# Altium PCB ADL5536-PCB.PcbDoc
Units mil, origin at the board's own origin, x right, y up, seen from the top; angles counter-clockwise.
Board outline 1503.03 x 1138.03 mil, 2 copper layers (Top Layer, Bottom Layer); 14 components, 6 nets, 63 pads, 87 vias.
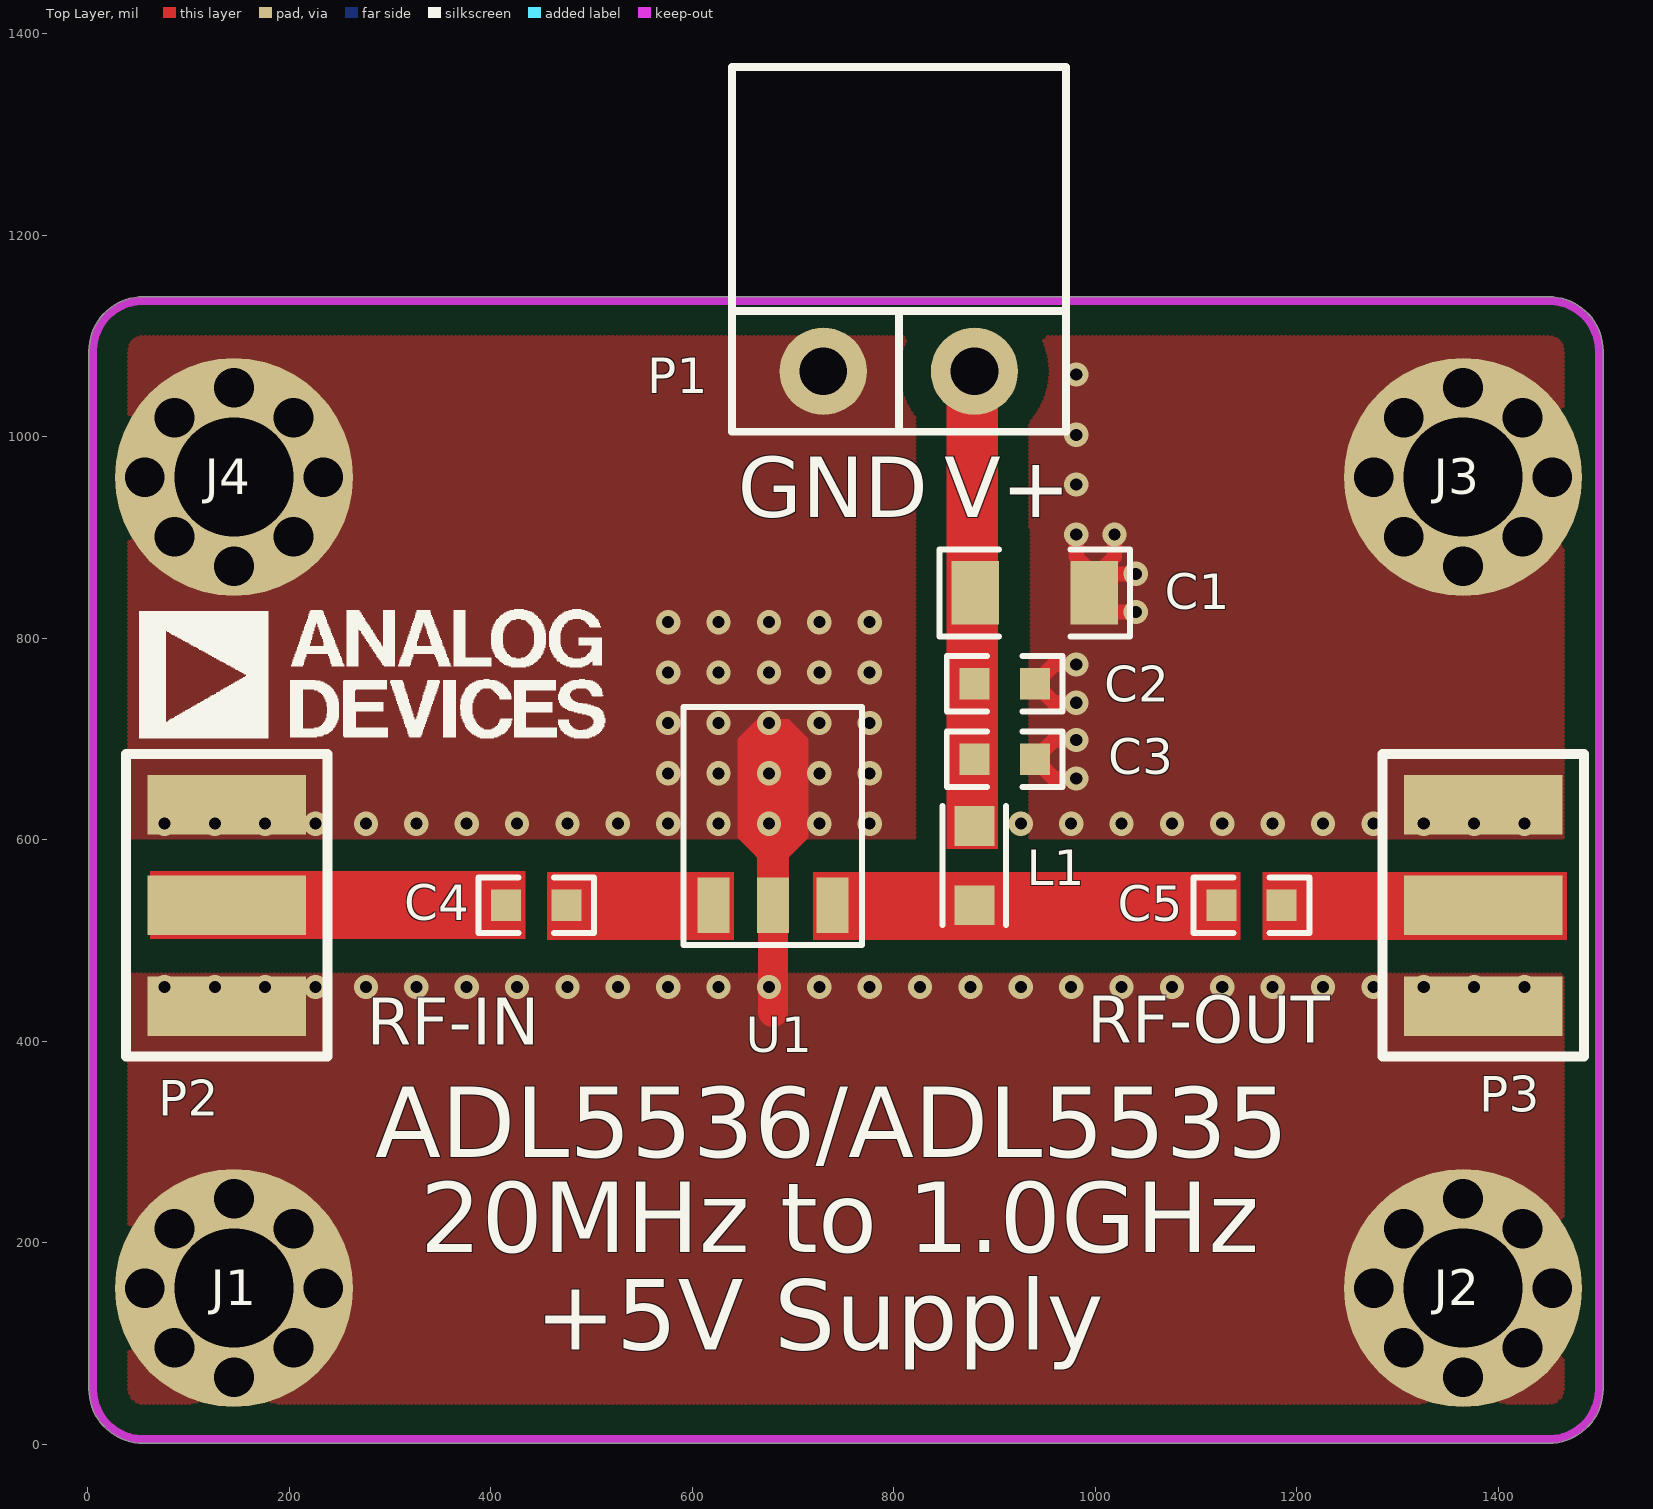
[diagram p0: Top Layer view]
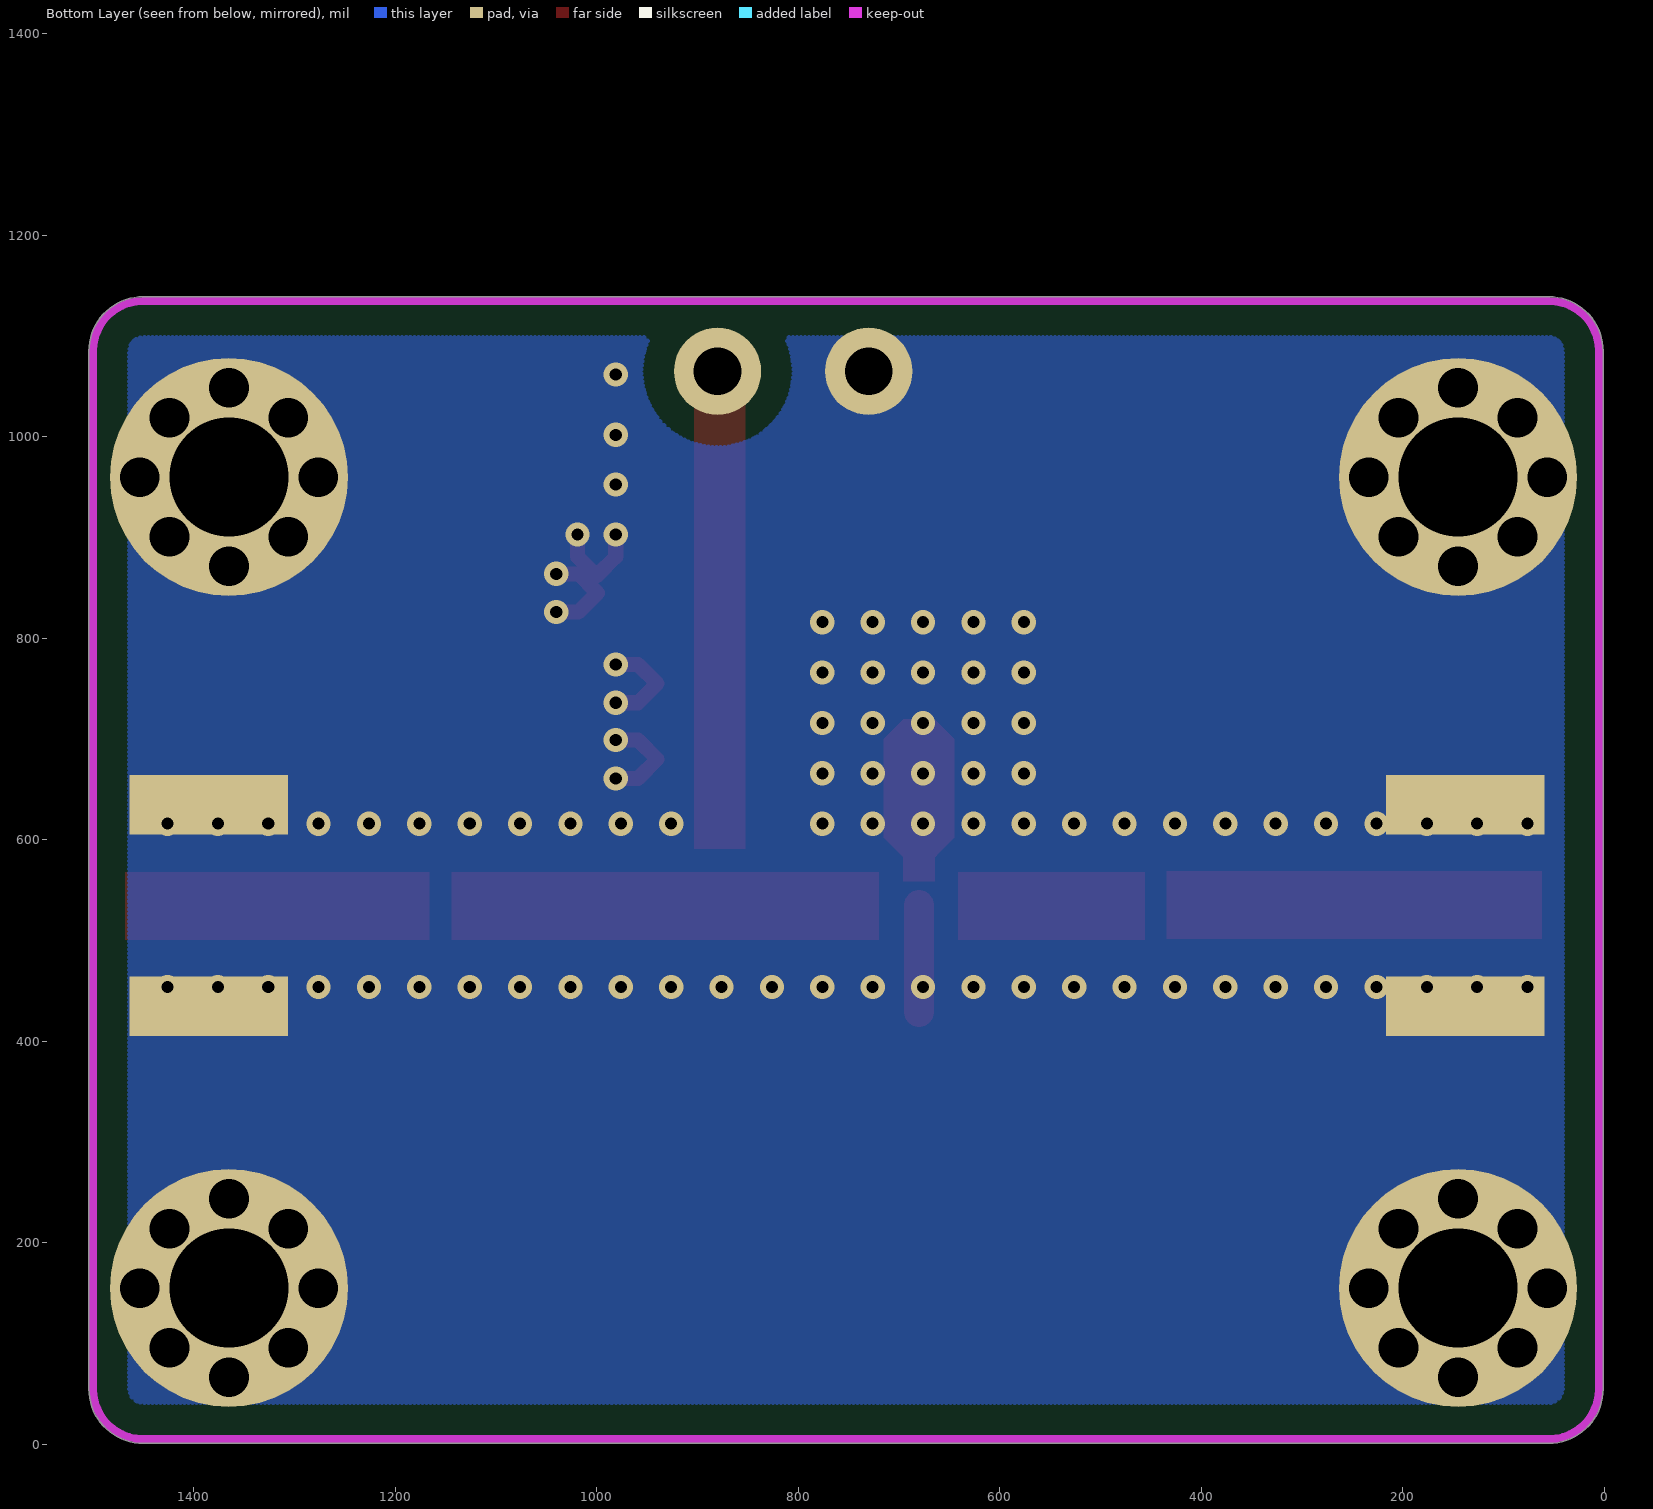
[diagram p1: Bottom Layer view, seen from below]

## Layer stack, top to bottom
Top Layer: signal copper 1.4
Dielectric: dielectric 12.6, FR-4, Dk 4.8
Bottom Layer: signal copper 1.4

## Board outline
0.98,55 0.98,1085 cw(c55,1085) 55,1139.02 1450,1139.02 cw(c1450,1085) 1504.01,1085 1504.01,55 cw(c1450,55) 1450,0.99 55,0.99 cw(c55,55)

## Design rules (kind name [scope] priority, off if disabled: settings)
Clearance Clearance_1 [inpoly] p1: gap=30
Clearance [All] p2: gap=10
PolygonConnect [All] p1: connectstyle=Direct reliefconductorwidth=10 reliefentries=4 polygonreliefangle="90 Angle"
RoutingVias [All] p1: holewidth=12 width=24 viastyle="Through Hole" minholewidth=12 minwidth=24 maxholewidth=12 maxwidth=24
SilkscreenOverComponentPads [All] p1: minsilkscreentomaskgap=10
SolderMaskExpansion [All] p1: expansion=2.5
Width [All] p1: maxlimit=60 minlimit=10 preferedwidth=10
27 further rules are at their usual default settings.

## Components (designator, comment, footprint, x,y, rotation, side; value= is the part's Value field where it differs from the comment)
C1 "1uF" 1206C 940,845 r0 top
C2 "1.2nF" 0603C 910,755 r0 top
C3 "68pF" 0603C 910,680 r0 top
C4 "0.1uF" 0603C 445,535 r0 top
C5 "0.1uF" 0603C 1155,535 r0 top
J1 "Hole-3mmx6mm" Hole 145,155 r0 top
J2 "Hole-3mmx6mm" Hole 1365,155 r0 top
J3 "Hole-3mmx6mm" Hole 1365,960 r0 top
J4 "Hole-3mmx6mm" Hole 145,960 r0 top
L1 "470nH" 0805L 880,574.37 r90 top
P1 "Header 2" KF2EDG_3R81_2P 805,1065 r0 top
P2 "RF IN" SMA-SMD 138,535 r270 top
P3 "RF OUT" SMA-SMD 1385,535 r90 top
U1 "ADL5536" SOT89 680,535 r0 top

## Footprints (in the part's own frame and the unit in brackets; to place one, negate y for a bottom-side part, rotate by r counter-clockwise, add the part's x,y. Pads: shape width x height; smd on the part's side, far side on the other; paste and mask are expansions set on the pad)
0603C [mm]
  rect 0.76x0.8 smd: 1(-0.76,0) 2(0.76,0)
  silkscreen extent -1.46,-0.7 1.46,0.7
0805L [mm]
  rect 1x1 smd: 1(-1,0) 2(1,0)
  silkscreen extent -1.5,-0.8 1.5,0.8
1206C [mm]
  rect 1.2x1.6 smd: 1(-1.5,0) 2(1.5,0)
  silkscreen extent -2.4,-1.1 2.4,1.1
Hole [mm]
  round 6 hole 3: 0(0,0)
  round 1 hole 1: 1(-2.25,0) 1(-1.5,-1.5) 1(-1.5,1.5) 1(0,-2.25) 1(0,2.25) 1(1.5,-1.5) 1(1.5,1.5) 1(2.25,0)
  Top Layer pour cut-out: -2.997,0.008 -2.769,-1.139 -2.119,-2.112 -1.147,-2.762 0,-2.99 0,-2.99 1.147,-2.762 2.119,-2.112 2.769,-1.139 2.997,0.008 2.997,0.008 2.769,1.155 2.119,2.127 1.147,2.777 0,3.005 0,3.005 -1.147,2.777 -2.119,2.127 -2.769,1.155 -2.997,0.008
KF2EDG_3R81_2P [mm]
  round 2.2 hole 1.2: 1(-1.905,0) 2(1.905,0)
  silkscreen extent -4.21,-1.52 4.21,7.68
SMA-SMD [mm]
  rect 1.5x4 smd: 1(0,0) 2(-2.54,0) 2(2.54,0)
  rect 1.5x4 smd far side: 2(-2.54,0) 2(2.54,0)
  silkscreen extent -3.81,-2.54 3.81,2.54, body extent -3,-11.89 3,1.71, height 3.2
SOT89 [mm]
  rect 0.8x1.4 smd: 1(-1.5,0) 2(0,0) 3(1.5,0)
  Top Layer region: -0.4,0.6 0.4,0.6 0.4,1.2 -0.4,1.2
  Top Layer region: 0,0.8 0.9,1.7 0,2.6 -0.9,1.7
  Top Layer region: -0.9,1.7 0.9,1.7 0.9,4.2 -0.9,4.2
  Top Layer region: -0.4,4.1 0.4,4.1 0.4,4.7 -0.4,4.7
  Top Layer region: -0.398,3.698 0.102,4.198 -0.4,4.7 -0.9,4.2
  Top Layer region: 0.402,3.702 0.9,4.2 0.4,4.7 -0.098,4.202
  silkscreen extent -2.25,-1 2.25,5

## Part data
C1 C2 C3 C4 C5: library part Cap1, "CAP CER 10000PF 100V X7R 0603"
J1 J2 J3 J4: library part HOLED
L1: library part Inductors, "FIXED IND 240NH 4.4A 22MOHM SMD"
P1: "Header, 2-Pin"
P2 P3: library part BNC, "BNC Elbow Connector"
U1: "Medium Power, High Linearity Amplifier"

## Via types
v1: diameter 24, hole 12, Top Layer to Bottom Layer, tented both sides, 87 vias

## Nets (pads, with @x,y where several pads share a name; then routed paths per layer and width w, separated by ;. In a path a pad name is that pad's centre, name@x,y a point inside that pad or via, vN(x,y) a via of type N, cw(c..) or ccw(c..) an arc to the next point about the centre after c; other vN are vias at no path point)
GND: C1.2 C2.2 C3.2 J1.0 J1.1 J2.0 J2.1 J3.0 J3.1 J4.0 J4.1 P1.1 P2.2 P3.2 U1.2 | length 497.6
  Top Layer w15: v1(981,661) 958.92,661 C3.2 958.92,699 v1(981,699) ; v1(981,736) 958.92,736 C2.2 958.92,774 v1(981,774) ; v1(981,903.08) 981,881 1000,862 1019,881 v1(1019,903.08) ; v1(1040.13,826) 1018.06,826 C1.2 1018.06,864 v1(1040.13,864)
  Top Layer w30: 680,429 U1.2
  other v1: 76,454 126,454 176,454 226,454 276,454 326,454 376,454 426,454 476,454 526,454 576,454 626,454 676,454 726,454 726,454 776,454 826,454 876,454 926,454 976,454 1026,454 1076,454 1126,454 1176,454 1226,454 1276,454 1326,454 1376,454 1426,454 76,616 126,616 176,616 226,616 276,616 326,616 376,616 426,616 476,616 526,616 576,616 626,616 676,616 726,616 726,616 776,616 926,616 976,616 1026,616 1076,616 1126,616 1176,616 1226,616 1276,616 1326,616 1376,616 1426,616 576,666 626,666 676,666 726,666 776,666 576,716 626,716 676,716 726,716 776,716 576,766 626,766 676,766 726,766 776,766 576,816 626,816 676,816 726,816 776,816 981,952.54 981,1002 981,1062
NetC4_1: C4.1 P2.1
NetC4_2: C4.2 U1.1
NetC5_1: C5.1 L1.1 U1.3
NetC5_2: C5.2 P3.1
VCC: C1.1 C2.1 C3.1 L1.2 P1.2

## Polygon pours and split planes (outlines as drawn)
GND on Top Layer "TOP-GND" (hatched 90Degree grid 4 track 5, remove dead copper, pour order 1000): 0.98,55 0.98,1085 cw(c55,1085) 55,1139.02 1450,1139.02 cw(c1450,1085) 1504.01,1085 1504.01,55 cw(c1450,55) 1450,0.99 55,0.99 cw(c55,55)
GND on Bottom Layer "TOP-GND" (hatched 90Degree grid 4 track 5, remove dead copper, pour order 1001): 0.98,55 0.98,1085 cw(c55,1085) 55,1139.02 1450,1139.02 cw(c1450,1085) 1504.01,1085 1504.01,55 cw(c1450,55) 1450,0.99 55,0.99 cw(c55,55)

## Keep-outs
Keep-Out Layer:
  lines w8: 75,1135 55,1135 ; 55,1135 ccw(c55,1085) 5,1085 5,55 ccw(c55,55) 55,5 1450,5 ccw(c1450,55) 1500,55 1500,1085 ccw(c1450,1085) 1450,1135 55,1135

## Other copper
Top Layer:
  region net NetC4_1: 62,569 434,569 434,502 62,502
  region net NetC4_2: 641,501 456,501 456,568 641,568
  region net NetC5_1: 905.13,501 720.13,501 720.13,568 905.13,568
  region net NetC5_1: 1144,501 861.08,501 861.08,568 1144,568
  region net NetC5_2: 1468,501 1166,501 1166,568 1468,568
  region net VCC: 903,1093 903,591.08 852.52,591.08 852.52,1093
  pour cut-out: 5,603 1485,603 1485,466 5,466

## Silkscreen, mask and mechanical layers (free items; w line width, h text height)
Top Overlay:
  drawing of 1480 lines, arcs and shapes, not listed
  text "RF-OUT" at 992,383 h80
  text "RF-IN" at 277,381 h80
  text "ADL5536/ADL5535" at 285,262 h120
  text "20MHz to 1.0GHz" at 330,168 h120
  text "+5V Supply" at 444,71 h120
Top Solder:
  rectangle: 661,504 698,579
  rectangle: 562,589 790,832
Bottom Solder:
  rectangle: 562,589 790,832

## Text inside footprints (layer, text, board x,y; h text height)
P1: Top Overlay "GND" at 645,920 h60; Top Overlay "V+" at 850,920 h60